# EAGLE board Orange_Suffocomp (EAGLE 9.6.0)
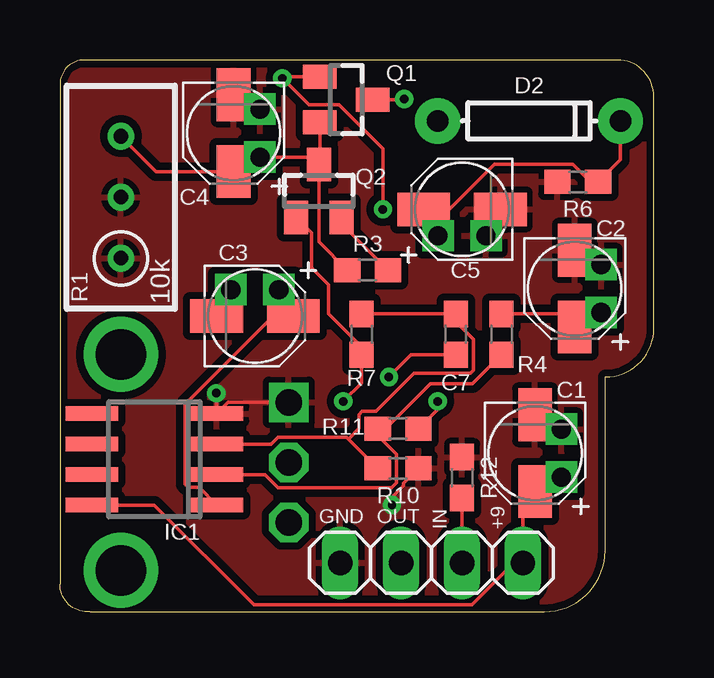
[diagram p0: board, top side]
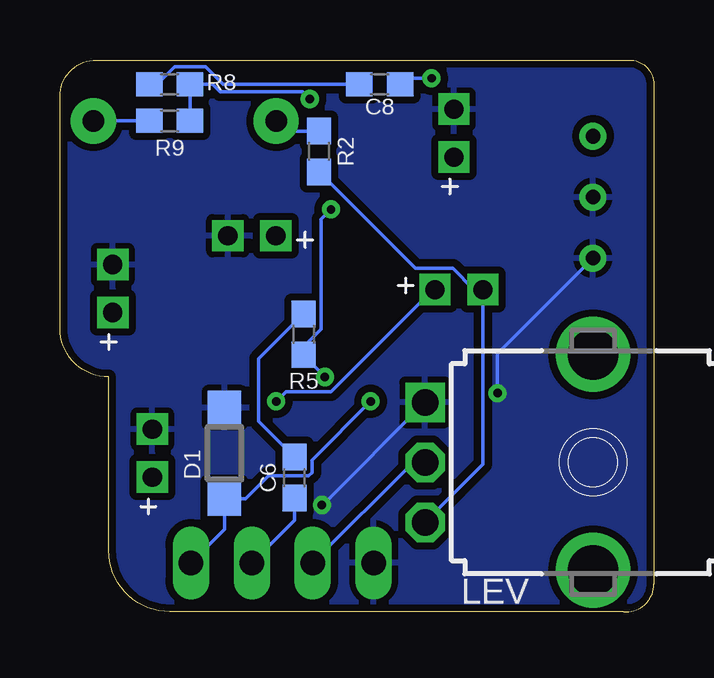
[diagram p1: board, bottom side, seen from below]

Size 24.77 x 22.99 mm. Coordinates in mm from the lower left corner, seen from the top.
Outline: 1.27,0 20.19,0 arc90 22.73,2.54 22.73,9.78 arc90 24.77,11.81 24.77,21.46 arc90 23.24,22.99 1.02,22.99 arc90 0,21.97 0,1.14 arc90 1.14,0 1.27,0
Copper layers (1*16): Top 0.035mm / dielectric 1.5mm / Bottom 0.035mm
Design rules "default *": minimum track width 6mil, minimum drill 0.35mm, track to track 6mil, track to pad 6mil, pad to pad 6mil, via to via 6mil, smd to smd 6mil, copper to edge 6mil, drill to drill 6mil, minimum pad ring 10mil, minimum via ring 8mil, stop-mask expansion 4mil, vias tented up to drill 0mil, thermal gap 10mil

## Footprints (pad centres in the part's own frame; a part is rotated, then mirrored left to right if it is on the bottom)
PAN_B_SMD+THRU = smd 2.2 x 1.4: + 1.6,0; - -1.6,0 | drill 0.8 pad 0.9 square: ++ 1,1.1; -- -1,1.1
0603 = smd 1.1 x 1: 1 -0.85,0; 2 0.85,0
SOD123 = smd 1.4 x 1.4: A 1.9,0; C -1.9,0
DIODE-1N4148 = drill 0.9 pad 1.88: A -3.81,0; C 3.81,0
SO08 = smd 0.6 x 2.2: 1 -1.905,-2.6; 2 -0.635,-2.6; 3 0.635,-2.6; 4 1.905,-2.6; 5 1.905,2.6; 6 0.635,2.6; 7 -0.635,2.6; 8 -1.905,2.6
1X04 = drill 1.016 long: 1 -3.81,0; 2 -1.27,0; 3 1.27,0; 4 3.81,0
9MM_SNAP-IN_POT = drill 1.1 square: 1 -2.5,-7 | drill 1.1 octagon: 2 0,-7; 3 2.5,-7 | drill 2.1 pad 2.794: CHASSIS1 -4.5,0; CHASSIS2 4.5,0
SOT23 = smd 1 x 1.4: 1 -0.95,-1.1; 2 0.95,-1.1; 3 0,1.1
RTRIM3296W = drill 0.61: 1 0,-2.54; 2 0,0; 3 0,2.54

## Placement (x,y rotation side)
C1  100uF  [PAN_B_SMD+THRU]  19.81,6.6 270 top
C2  4.7uF  [PAN_B_SMD+THRU]  21.46,13.46 270 top
C3  4.7uF  [PAN_B_SMD+THRU]  8.13,12.32 0 top
C4  4.7uF  [PAN_B_SMD+THRU]  7.24,19.94 270 top
C5  4.7uF  [PAN_B_SMD+THRU]  16.76,16.76 180 top
C6  47nF  [0603]  14.99,5.59 90 bottom
C7  47nF  [0603]  16.51,11.56 90 top
C8  2.2nF  [0603]  11.43,21.97 0 bottom
D1  1N5819  [SOD123]  17.91,6.6 90 bottom
D2  1n34a  [DIODE-1N4148]  19.56,20.45 0 top
IC1  LM4558D  [SO08]  3.94,6.35 90 top
JP1  [1X04]  15.49,2.03 180 top
LEV  A10k  [9MM_SNAP-IN_POT]  2.54,6.22 270 bottom
Q1  MMBF5457  [SOT23]  11.94,21.34 270 top
Q2  MMBF5457  [SOT23]  10.79,17.53 0 top
R1  10k  [RTRIM3296W]  2.54,17.27 0 top
R2  1.5k  [0603]  13.97,19.18 270 bottom
R3  2.4k  [0603]  12.83,14.22 0 top
R4  10k  [0603]  18.41,11.56 90 top
R5  82k  [0603]  14.61,11.56 270 bottom
R6  100k  [0603]  21.59,17.91 180 top
R7  390k  [0603]  12.57,11.56 270 top
R8  470k  [0603]  20.19,21.97 0 bottom
R9  470k  [0603]  20.19,20.45 180 bottom
R10  470k  [0603]  14.1,5.97 180 top
R11  220k  [0603]  14.1,7.62 0 top
R12  4.7M  [0603]  16.76,5.59 270 top

## Library data of the parts
C1-C5 LEV = MusicThingModular
C6 C7 = SparkFun-Capacitors; PROD_ID: CAP-08605
C8 = SparkFun-Capacitors; PROD_ID: CAP-07877
D1 = diode
D2 = SparkFun-DiscreteSemi; PROD_ID: DIO-08378
IC1 = linear
JP1 = Connector; CATEGORY: CONNECTOR; SUB-CATEGORY: PIN-HEADER
Q1 Q2 = MMBF5457; AVAILABILITY: Unavailable; DESCRIPTION: JFET N-Channel 25V 350mW Surface Mount SOT-23-3; MF: ON Semiconductor; MP: MMBF5457; PACKAGE: SOT-23-3 Fairchild Semiconductor; PRICE: None
R1 = resistor
R2 = SparkFun-Resistors; PROD_ID: RES-08306
R3 = SparkFun-Resistors; PROD_ID: RES-09568
R4 = SparkFun-Resistors; PROD_ID: RES-00824
R5 = SparkFun-Resistors; PROD_ID: RES-12311
R6 = SparkFun-Resistors; PROD_ID: RES-07828
R7 = SparkFun-Resistors; PROD_ID: RES-12024
R8-R10 = SparkFun-Resistors; PROD_ID: RES-07869
R11 = SparkFun-Resistors; PROD_ID: RES-08969
R12 = SparkFun-Resistors; PROD_ID: RES-07857

## Nets
GND: C1.- C1.-- C2.- C2.-- C4.- C4.-- C5.- C5.-- D1.A IC1.4 JP1.4 LEV.1 R1.1 R1.2 R6.2 R10.1 R12.1
IN: C6.1 JP1.2 R12.2
LEV3: C3.- C3.-- LEV.3 R2.2
N$1: C6.2 R5.1
N$2: C7.1 C8.2 Q1.1 R5.2
N$3: C7.2 IC1.3 R7.1 R10.2
N$4: C8.1 R8.1
N$5: C2.+ C2.++ R4.2
N$6: IC1.2 R4.1 R11.1
N$7: C3.+ C3.++ IC1.1 R11.2
N$8: Q1.3 R8.2 R9.1
N$9: C4.+ C4.++ Q1.2 Q2.3 R1.3 R3.1
N$10: Q2.2 R3.2
N$11: C5.+ C5.++ D2.C R6.1 R9.2
N$12: D2.A R2.1
OUT: JP1.3 LEV.2
VCC: C1.+ C1.++ D1.C IC1.8 JP1.1 Q2.1 R7.2

## Tracks (layer width: path | path; a pad name or v marks a point on that pad's centre or on a via)
GND  (via drill 0.35)
  Top 0.152: R10.1 14.33,5.35 14.33,5.25 13.84,4.76 v13.84,4.45 | v6.52,9.1 6.54,9.09 IC1.4 7,8.72 LEV.1
  Bottom 0.152: LEV.1 13.82,4.45 v13.84,4.45 | R1.1 6.52,10.75 v6.52,9.1
  pour Top (isolate 0.305): -0.51,23.24 -0.51,0.64 0.76,-0.64 21.34,-0.64 23.88,1.91 25.78,3.81 25.78,23.37 -0.38,23.37
  pour Bottom (isolate 0.305): -0.51,23.11 -0.51,-0.13 -0.25,-0.38 21.97,-0.38 25.53,3.17 25.53,22.48 24.38,23.62 0,23.62
IN
  Top 0.152: R12.2 JP1.2
  Bottom 0.152: JP1.2 14.99,3.81 C6.1
LEV3
  Top 0.152: C3.- 6.53,12.82 C3.--
  Bottom 0.152: LEV.3 7.13,6.13 C3.-- 7.5,13.42 8.38,14.3 9.95,14.3 R2.2
N$1
  Bottom 0.152: C6.2 16.48,7.93 16.48,10.54 R5.1
N$2  (via drill 0.35)
  Top 0.152: v13.72,9.78 14.64,10.71 C7.1 | Q1.1 9.33,22.29 v9.27,22.23 10.38,21.11 11.63,21.11 13.46,19.29 v13.46,16.76
  Bottom 0.152: v13.72,9.78 14.61,10.67 R5.2 14.61,11.03 13.88,11.76 13.88,16.35 v13.46,16.76 | v9.27,22.23 10.33,22.23 C8.2
N$3
  Top 0.152: IC1.3 8.81,6.99 9.1,7.28 11.94,7.28 12.02,7.2 | R10.2 12.02,7.2 | R7.1 C7.2 16.51,12.08 17.24,11.35 17.24,10.06 17.11,9.93 14.75,9.93 13.18,8.35 12.6,8.35 12.47,8.21 12.47,7.64 12.02,7.2
N$4
  Bottom 0.152: C8.1 17.97,21.97 18.7,22.7 19.99,22.7 20.72,21.97 R8.1
N$5
  Top 0.152: R4.2 20.92,12.41 C2.+ 21.96,11.86 C2.++
N$6
  Top 0.152: R4.1 17.2,9.49 15.45,9.49 13.57,7.62 13.34,7.62 | 13.34,7.62 R11.1 | IC1.2 8.56,5.71 9.1,5.17 13.82,5.17 14.03,5.37 14.03,6.56 13.34,7.25 13.34,7.62
N$7  (via drill 0.35)
  Top 0.152: IC1.1 5.8,5.19 5.34,5.19 5.21,5.32 5.21,8.65 8.88,12.32 C3.+ 9.13,12.92 C3.++ | v15.75,8.76 15.75,8.42 R11.2
  Bottom 0.152: C3.++ 9.22,13.42 13.46,9.17 15.34,9.17 v15.75,8.76
N$8  (via drill 0.35)
  Top 0.152: Q1.3 14.32,21.34 v14.35,21.36
  Bottom 0.152: R9.1 R8.2 18.4,21.97 18.1,21.67 14.65,21.67 v14.35,21.36
N$9
  Top 0.152: 10.79,18.54 Q2.3 10.84,18.67 Q1.2 | 10.79,18.54 10.79,15.41 R3.1 | 10.79,18.54 10.4,18.94 C4.++ 7.84,18.94 C4.+ 4.01,18.34 R1.3
N$10
  Top 0.152: Q2.2 11.74,16.16 R3.2
N$11
  Top 0.152: C5.++ 15.16,16.26 C5.+ 16.24,16.76 18.11,18.64 21.39,18.64 22.11,17.91 R6.1 23.37,18.84 D2.C
  Bottom 0.152: R9.2 D2.C
N$12
  Bottom 0.152: D2.A 15.33,20.03 R2.1
OUT
  Bottom 0.152: LEV.2 10.03,6.22 JP1.3
VCC  (via drill 0.35)
  Top 0.152: C1.++ 20.31,5 C1.+ 19.3,4.5 JP1.1 18.93,2.03 17.17,0.28 8.1,0.28 3.94,4.45 IC1.8 | Q2.1 10.49,15.78 10.49,14.34 11.2,13.63 11.2,12.41 12.57,11.03 R7.2 12.57,9.53 v11.81,8.76
  Bottom 0.152: JP1.1 17.91,3.43 D1.C | D1.C | D1.C 17.02,4.7 16.06,5.66 14.39,5.66 14.26,5.79 14.26,6.32 v11.81,8.76

## Text on the board
tPlace: 10k | GND | OUT | IN | +9